# Altium PCB PCB_Jednoruki_bandit.PcbDoc
Units mil, origin at the board's own origin, x right, y up, seen from the top; angles counter-clockwise.
Board outline 4291.34 x 2440.94 mil, 2 copper layers (Top Layer, Bottom Layer); 55 components, 43 nets, 194 pads, 15 vias.
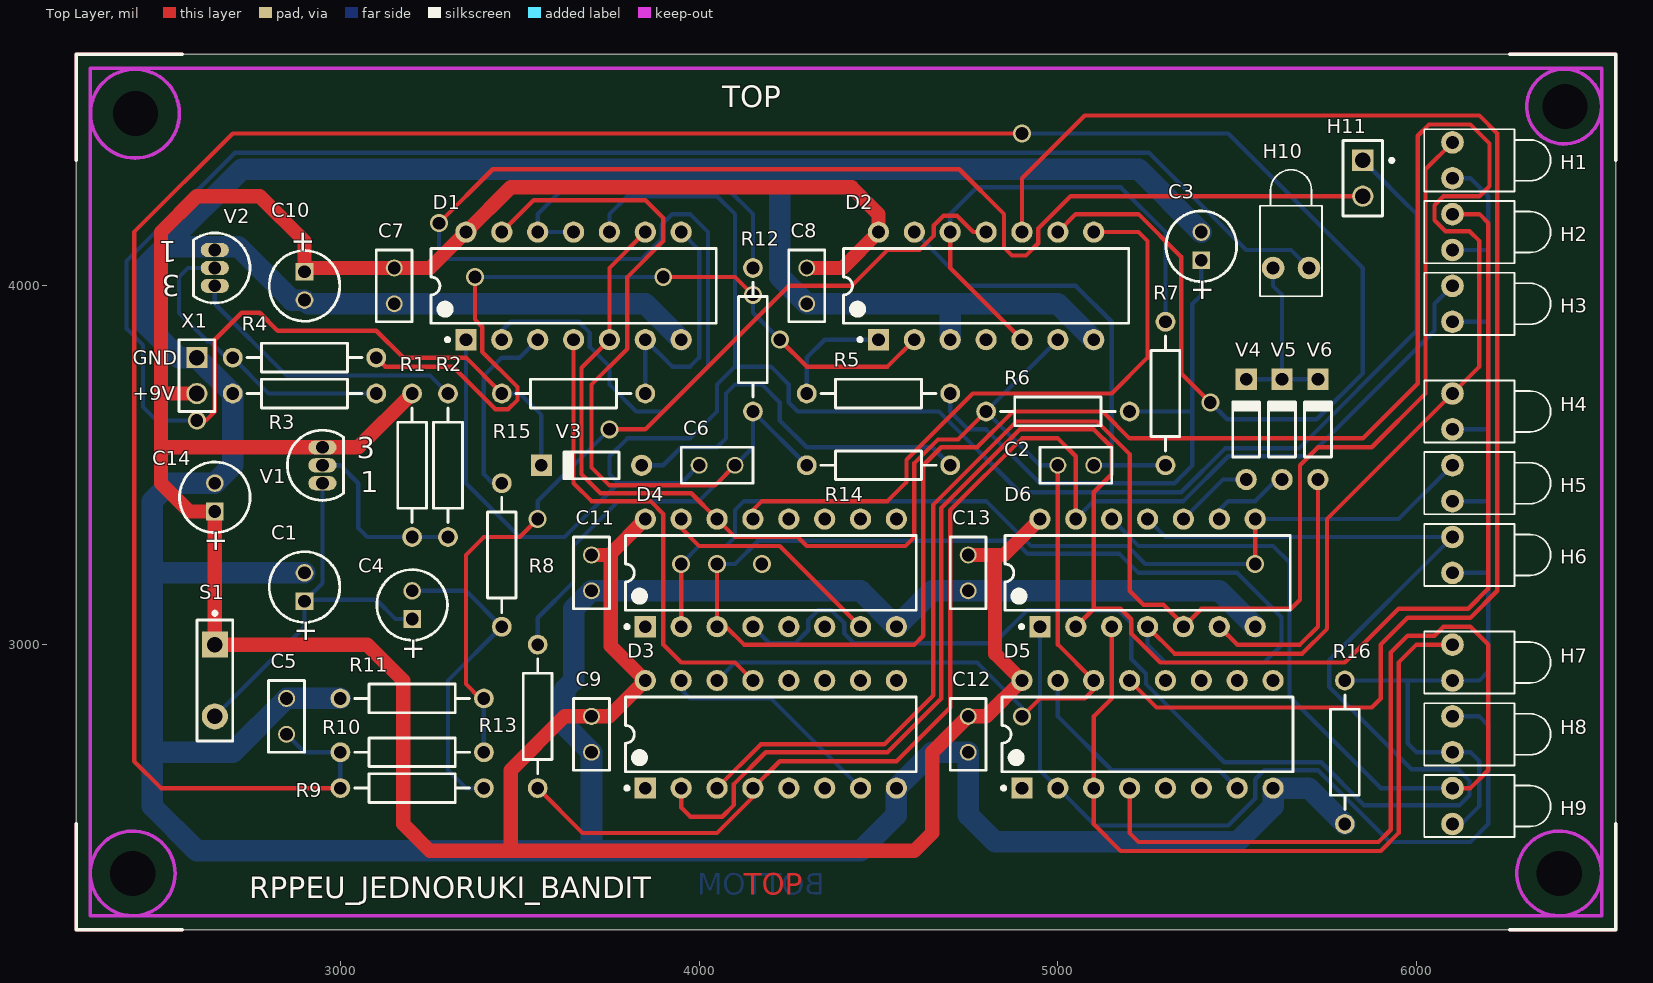
[diagram p0: Top Layer view]
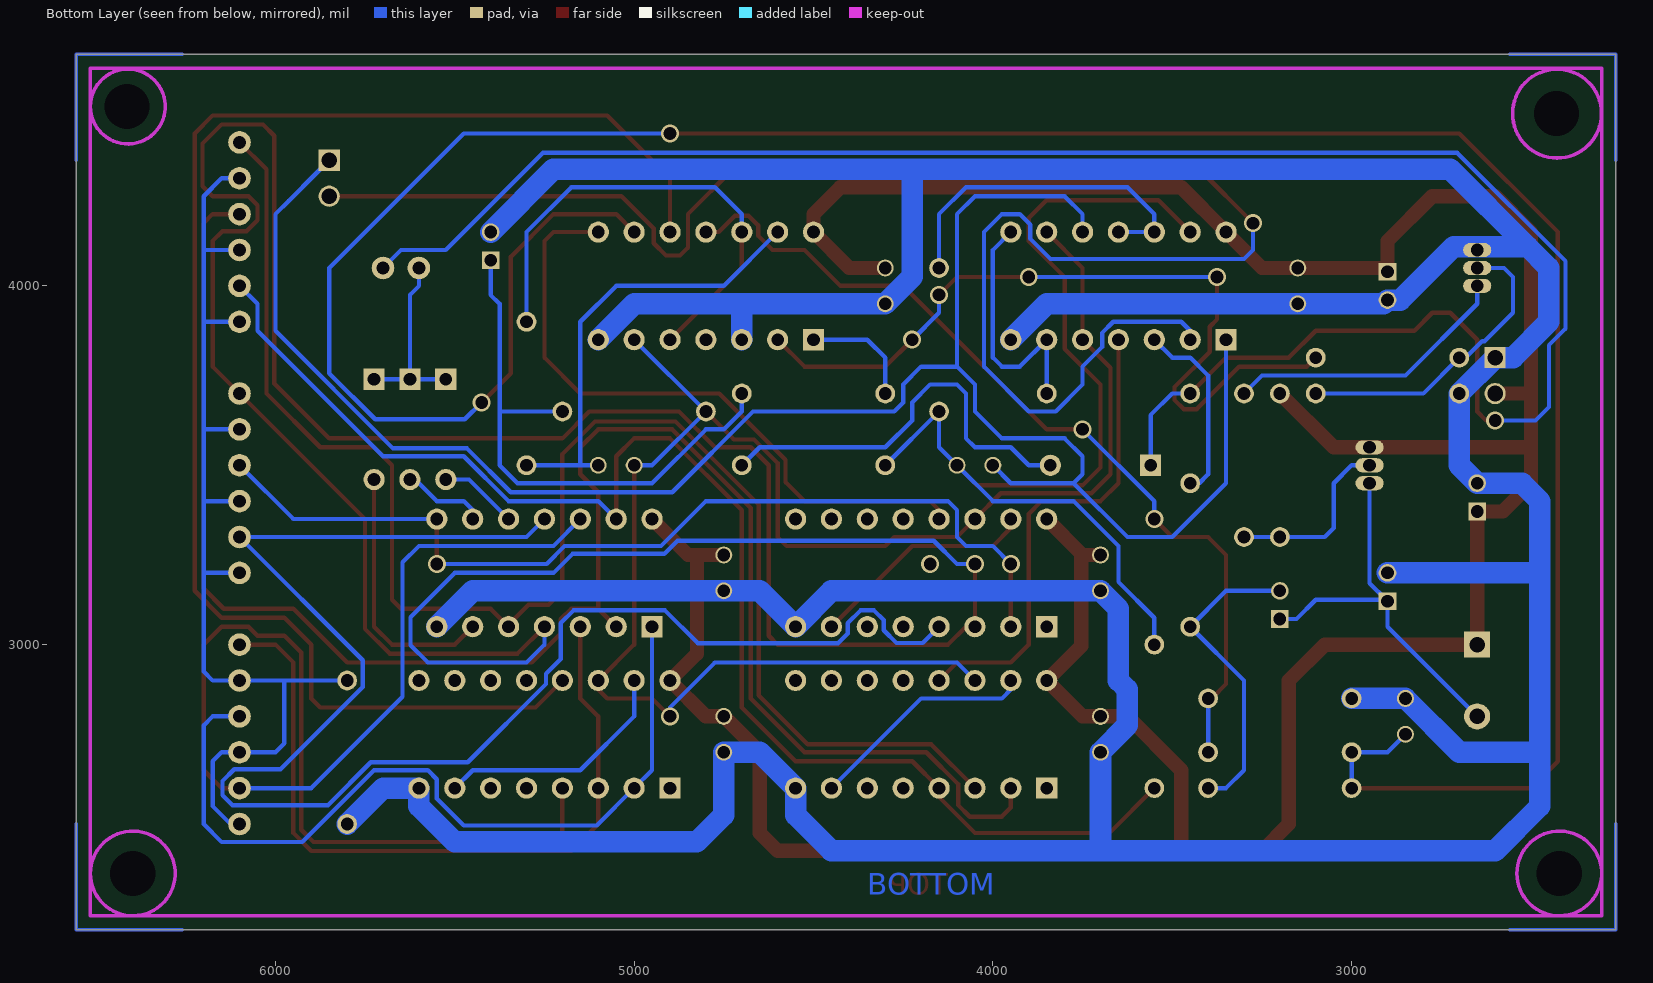
[diagram p1: Bottom Layer view, seen from below]

## Layer stack, top to bottom
Top Layer: signal copper 1.4
Dielectric: dielectric 12.6, FR-4, Dk 4.8
Bottom Layer: signal copper 1.4

## Board outline
2263.78,2204.72 2263.78,4645.67 6555.12,4645.67 6555.12,2204.72

## Design rules (kind name [scope] priority, off if disabled: settings)
Clearance [All] p1: gap=10
HoleSize [All] p1: absolutevalues=TRUE maxlimit=125.98 minlimit=1 maxpercent=80.000 minpercent=20.000
MinimumSolderMaskSliver [All] p1: minsoldermaskwidth=2
PolygonConnect [All] p1: connectstyle=Relief reliefconductorwidth=10 reliefentries=4 polygonreliefangle="90 Angle"
RoutingVias [All] p1: holewidth=28 width=50 viastyle="Through Hole" minholewidth=28 minwidth=50 maxholewidth=28 maxwidth=50
SilkscreenOverComponentPads [All] p1: minsilkscreentomaskgap=2
SolderMaskExpansion [All] p1: expansion=4
Width [All] p1: maxlimit=60 minlimit=10 preferedwidth=12
25 further rules are at their usual default settings.

## Components (designator, comment, footprint, x,y, rotation, side; value= is the part's Value field where it differs from the comment)
C1 "4u7/16V" CAPPR2-5x6.8 2900,3160.63 r90 top
C2 "10n" RAD-0.1 5050,3500 r180 top
C3 "4u7/16V" CAPPR2-5x6.8 5400,4110.63 r90 top
C4 "1u/16V" CAPPR2-5x6.8 3200,3110.63 r90 top
C5 "10n" RAD-0.1 2850,2800 r270 top
C6 "10n" RAD-0.1 4050,3500 r180 top
C7 "100n" RAD-0.1 3150,4000 r90 top
C8 "100n" RAD-0.1 4300,4000 r90 top
C9 "100n" RAD-0.1 3700,2750 r90 top
C10 "10u/16V" CAPPR2-5x6.8 2900,4000 r270 top
C11 "100n" RAD-0.1 3700,3200 r90 top
C12 "100n" RAD-0.1 4750,2750 r90 top
C13 "100n" RAD-0.1 4750,3200 r90 top
C14 "100u/16V" CAPPR2-5x6.8 2650,3410.63 r90 top
D1 "40106" DIP-14 3650,4000 r90 top
D2 "40106" DIP-14 4800,4000 r90 top
D3 "4017" DIP-16 4200,2750 r90 top
D4 "4017" DIP-16 4200,3200 r90 top
D5 "4017" DIP-16 5250,2750 r90 top
D6 "4073" DIP-14 5250,3200 r90 top
H1 "LED1" LED-1 6100,4350 r0 top
H2 "LED1" LED-1 6100,4150 r0 top
H3 "LED1" LED-1 6100,3950 r0 top
H4 "LED1" LED-1 6100,3650 r0 top
H5 "LED1" LED-1 6100,3450 r0 top
H6 "LED1" LED-1 6100,3250 r0 top
H7 "LED1" LED-1 6100,2950 r0 top
H8 "LED1" LED-1 6100,2750 r0 top
H9 "LED1" LED-1 6100,2550 r0 top
H10 "LED1" LED-1 5650,4050 r90 top
H11 "PB2720" PIN2 5850,4350 r270 top
R1 "10k" AXIAL-0.4 3200,3500 r90 top
R2 "4k7" AXIAL-0.4 3300,3500 r270 top
R3 "10k" AXIAL-0.4 2900,3700 r0 top
R4 "10k" AXIAL-0.4 2900,3800 r0 top
R5 "10k" AXIAL-0.4 4500,3700 r0 top
R6 "220k" AXIAL-0.4 5000,3650 r180 top
R7 "1M5" AXIAL-0.4 5300,3700 r90 top
R8 "10k" AXIAL-0.4 3450,3250 r90 top
R9 "470k" AXIAL-0.4 3200,2600 r0 top
R10 "10k" AXIAL-0.4 3200,2700 r180 top
R11 "3M3" AXIAL-0.4 3200,2850 r0 top
R12 "33k" AXIAL-0.4 4150,3850 r270 top
R13 "100k" AXIAL-0.4 3550,2800 r90 top
R14 "33k" AXIAL-0.4 4500,3500 r0 top
R15 "1k" AXIAL-0.4 3650,3700 r180 top
R16 "330" AXIAL-0.4 5800,2700 r270 top
S1 "SW-PB" SPST-2 2650,2900 r270 top
V1 "PNP" TO-92A 2950,3500 r0 top
V2 "NPN" TO-92A 2650,4050 r180 top
V3 "Diode" DO-35 3700,3500 r180 top
V4 "1N4148" DIO7.1-3.9x1.9 5525,3600 r90 top
V5 "1N4148" DIO7.1-3.9x1.9 5625,3600 r90 top
V6 "1N4148" DIO7.1-3.9x1.9 5725,3600 r90 top
X1 "Baterija" HDR1X2 2600,3800 r270 top

## Footprints (in the part's own frame and the unit in brackets; to place one, negate y for a bottom-side part, rotate by r counter-clockwise, add the part's x,y. Pads: shape width x height; smd on the part's side, far side on the other; paste and mask are expansions set on the pad)
AXIAL-0.4 [mm] "Axial Device, Thru-Hole; 2 Leads; 0.4 in Pin Spacing"
  round 1.4 hole 0.9: 1(-5.08,0) 2(5.08,0)
  silkscreen extent -4.06,-1.02 4.06,1.02
CAPPR2-5x6.8 [mm] "Capacitor, Electrolytic, Radial; Body 5 x 6.8 mm (Dia.xH typ); Pin Spacing 2 mm (typ)"
  rect 1.25x1.25 hole 0.9: 1(-1,0)
  round 1.25 hole 0.9: 2(1,0)
  silkscreen extent -2.5,-2.5 2.5,2.5
DIO7.1-3.9x1.9 [mm] "Diode, Axial; Body 3.8 x 1.9 mm (LxDia. max), Lead Dia. 0.53 mm (max)"
  round 1.5 hole 0.9: 1(-3.55,0)
  rect 1.5x1.5 hole 0.9: 2(3.55,0)
  silkscreen extent -1.95,-0.95 2.05,0.95
DIP-14 [mm] "DIP; 14 Leads; Row Spacing 7.62 mm; Pitch 2.54 mm"
  rect 1.5x1.5 hole 0.9: 1(-3.81,7.62)
  round 1.5 hole 0.9: 2(-3.81,5.08) 3(-3.81,2.54) 4(-3.81,0) 5(-3.81,-2.54) 6(-3.81,-5.08) 7(-3.81,-7.62) 8(3.81,-7.62) 9(3.81,-5.08) 10(3.81,-2.54) 11(3.81,0) 12(3.81,2.54) 13(3.81,5.08) 14(3.81,7.62)
  silkscreen extent -3.93,-10.1 2.65,10.1, body extent -3.6,-10.1 3.6,10.1, height 5.08
DIP-16 [mm] "DIP; 16 Leads; Row Spacing 7.62 mm; Pitch 2.54 mm"
  rect 1.5x1.5 hole 0.9: 1(-3.81,8.89)
  round 1.5 hole 0.9: 2(-3.81,6.35) 3(-3.81,3.81) 4(-3.81,1.27) 5(-3.81,-1.27) 6(-3.81,-3.81) 7(-3.81,-6.35) 8(-3.81,-8.89) 9(3.81,-8.89) 10(3.81,-6.35) 11(3.81,-3.81) 12(3.81,-1.27) 13(3.81,1.27) 14(3.81,3.81) 15(3.81,6.35) 16(3.81,8.89)
  silkscreen extent -3.93,-10.3 2.65,10.31, body extent -3.6,-10.28 3.6,10.28, height 5.08
DO-35 [mm] "Diode, Axial; Body 3.8 x 1.9 mm (LxDia. max), Lead Dia. 0.53 mm (max)"
  round 1.5 hole 0.9: 1(-3.55,0)
  rect 1.5x1.5 hole 0.9: 2(3.55,0)
  silkscreen extent -1.95,-0.95 2.05,0.95
HDR1X2 [mm] "Connector; Header; 2 Position"
  rect 1.5x1.5 hole 1.1: 1(0,0)
  round 1.5 hole 1.1: 2(2.54,0)
  silkscreen extent -1.27,-1.27 3.81,1.27
LED-1 [mm] "Typical RED GaAs LED; 2 Leads"
  round 1.6 hole 0.9: 1(0,1.27) 2(0,-1.27)
  silkscreen extent -2,-2.2 6.95,2.2
PIN2 [mm] "Photosensitive Diode; 2 Leads"
  rect 1.5x1.5 hole 1.1: 1(0,0)
  round 1.5 hole 1.1: 2(2.54,0)
  silkscreen extent -1.4,-1.4 3.94,2.18
RAD-0.1 [mm] "Radial Cap, Thru-Hole; 2 Leads; 0.1 in Pin Spacing"
  round 1.2 hole 0.9: 1(-1.27,0) 2(1.27,0)
  silkscreen extent -2.54,-1.27 2.54,1.27
SPST-2 [mm] "Circuit Breaker; 2 Leads"
  rect 1.85x1.85 hole 1.1: 1(-2.54,0)
  round 1.85 hole 1.1: 2(2.54,0)
  silkscreen extent -4.89,-1.27 4.28,1.27
TO-92A [mm] "TO, Flat Index; 3 In-Line, Axial Leads; Body Dia. 4.5mm; Leads 0.51 x 0.48 mm (max)"
  oval 2x1 hole 0.9: 1(0,-1.27) 2(0,0) 3(0,1.27)
  silkscreen extent -2.48,-2.48 1.5,2.48

## Part data
C1 C3 C4 C10 C14: library part Elektrolitski_kondenzator
C2 C5 C6 C7 C8 C9 C11 C12 C13: library part Cap, "Capacitor"
H1 H2 H3 H4 H5 H6 H7 H8 H9 H10: "Typical RED GaAs LED"
H11: library part Speaker, "Loudspeaker"
R1 R2 R3 R4 R5 R6 R7 R8 R9 R10 R11 R12 R13 R14 R15 R16: library part Res2, "Resistor"
S1: "Switch"
V1: "PNP Bipolar Transistor"
V2: "NPN Bipolar Transistor"
V3: "Default Diode"
V4 V5 V6: library part "Diode 1N4148", "High Conductance Fast Diode"
X1: library part "Header 2", "Header, 2-Pin"

## Free pads (board coordinates)
  round 118.11 hole 125.98: 0(2421.26,2362.2) 0(2429.13,4480.31) 0(6397.64,2362.2) 0(6413.39,4500)

## Via types
v1: diameter 50, hole 35.43, Top Layer to Bottom Layer, 15 vias

## Nets (pads, with @x,y where several pads share a name; then routed paths per layer and width w, separated by ;. In a path a pad name is that pad's centre, name@x,y a point inside that pad or via, vN(x,y) a via of type N, cw(c..) or ccw(c..) an arc to the next point about the centre after c; other vN are vias at no path point)
GND: C1.2 C3.2 C5.1 C7.1 C8.1 C9.1 C10.2 C11.1 C12.1 C13.1 C14.2 D1.7 D2.3 D2.7 D3.8 D4.8 D5.8 D6.7 R3.1 R11.1 R16.2 V2.1 X1.1 | length 15478.4
  Bottom Layer w60: C1.2 2475,3200 ; R11.1 C5.1 2700,2700 2475,2700 ; D1.7 3850,3950 3225,3950 C7.1 2910.63,3950 C10.2 2864.37,3960.63 2715.32,4109.69 2509.68,4109.69 ; D2.3 4700,3950 ; D2.7 5000,3950 4700,3950 ; C3.2 5225,4325 4225,4325 ; D6.7 5450,3150 C13.1 4650,3150 D4.8 4450,3150 C11.1 3650,3100 3650,2900 3625,2875 3625,2775 C9.1 3700,2425.79 3700.79,2425 ; R16.2 5700,2600 D5.8 5600,2550 5500,2450 5019.68,2450 4825,2450 4750,2525 C12.1 4650,2700 D3.8 4550,2525 4450,2425 3700.79,2425 ; 2475,2700 2475,2550 2600,2425 3700.79,2425 ; 2475,2700 2475,3200 ; 2475,3200 2475,3400 2525,3450 C14.2 2700,3500 R3.1 X1.1 2550,3800 2450,3900 2450,4050 2509.68,4109.69 ; 2509.68,4109.69 2725,4325 4225,4325 ; 4225,4325 4225,4025 C8.1 4700,3950
NetC1_1: C1.1 C4.1 S1.2 V1.1 | length 1092.8
  Bottom Layer w12: S1.2 2900,3050 C1.1 C1.1@2903.74,3125 ; V1.1 2950,3171.26 C1.1@2903.74,3125 ; C4.1 3153.74,3071.26 3100,3125 C1.1@2903.74,3125
NetC2_1: C2.1 D2.13 R7.1 | length 1253.6
  Bottom Layer w12: D2.13 4750,4000 5050,4000 5150,3900 5150,3500 ; C2.1 5150,3500 ; R7.1 5150,3500
NetC2_2: C2.2 D1.5 D1.9 D2.6 D3.14 D4.14 D5.14 R6.2 | length 4625.6
  Top Layer w12: D1.9 3750,4050 D1.5 3672,3772 3672,3475 3725,3422 3978,3422 D4.14 4100,3300 4275,3300 4300,3275 4575,3275 4600,3300 4600,3506.11 4665.89,3572 4722,3572 R6.2 ; v1(4900,2800) 4950,2850 5075,2850 5100,2875 D5.14 5000,3000 C2.2
  Bottom Layer w12: D3.14 4100,2950 4775,2950 4900,2825 v1(4900,2800) ; C2.2 4950,3500 R6.2 D2.6
NetC3_1: C3.1 R5.2 R6.1 | length 1685.2
  Bottom Layer w12: R5.2 4700,3650 4750,3600 4800,3600 4950,3450 5325,3450 5375,3500 5375,3650 R6.1 ; 5375,3550 5375,3950 5400,3975 C3.1
NetC4_2: C4.2 R8.1 R9.2 | length 874.3
  Bottom Layer w12: C4.2 3350,3150 R8.1 3300,2900 3300,2650 3350,2600 R9.2
NetC5_2: C5.2 D2.9 R9.1 R10.2 | length 7690.9
  Top Layer w12: R9.1 2500,2600 2425,2675 2425,4150 2700,4425 v1(4900,4425) ; D2.9 5050,4200 5225,4200 5343.56,4081.44 5343.56,3756.44 v1(5425,3675)
  Bottom Layer w12: C5.2 2900,2700 R10.2 R9.1 ; v1(4900,4425) 5475,4425 5850,4050 5850,3756.11 5721.94,3628.06 5471.94,3628.06 v1(5425,3675)
NetC6_1: C6.1 D1.13 R12.2 R13.2 R14.1 | length 2971.8
  Top Layer w12: D1.13 3539,4239 3850,4239 3900,4189 3900,4125 3800,4025 3800,3825 3700,3725 3700,3494 3750,3444 4044,3444 C6.1
  Bottom Layer w12: R13.2 3550,3075 3650,3175 3650,3275 3775,3400 4000,3400 C6.1 4150,3550 R12.2 R14.1
NetC6_2: C6.2 D1.1 D1.10 H11.1 | length 5442
  Bottom Layer w12: D1.1 3350,3450 3500,3300 3625,3300 3775,3450 ; D1.10 3750,4200 3800,4250 4050,4250 4100,4200 4100,3775 ; C6.2 3950,3450 3775,3450 ; H11.1 5887.5,4312.5 5962.5,4237.5 6000,4200 6000,3875 5672,3547 5465.89,3547 5343.89,3425 4893.89,3425 4668.89,3650 4275,3650 4250,3675 4250,3725 4200,3775 4100,3775 ; 3775,3450 3750,3475 3750,3525 3800,3575 3975,3575 4050,3650 4050,3725 4100,3775
NetD1_2: D1.2 H11.2 | length 5007.9
  Top Layer w12: v1(3275,4175) 3425,4325 4725,4325 4850,4200 4850,4106.69 4872.05,4084.65 4911.42,4084.65 4945.53,4118.76 4945.53,4159.91 5035.61,4250 H11.2
  Bottom Layer w12: v1(3275,4175) 3275,4100 3300,4075 3839.39,4075 3895.53,4131.14 3895.53,4170.53 3925,4200 3975,4200 4025,4150 4025,3775 3900,3650 3825,3650 3750,3725 3750,3775 3695.53,3829.47 3695.53,3868.86 3664.39,3900 3475,3900 3450,3875 D1.2
NetD1_3: D1.3 R8.2 | length 526.8
  Bottom Layer w12: R8.2 3425,3450 3400,3475 3400,3750 3450,3800 3500,3800 D1.3
NetD1_4: D1.4 D3.13 | length 1341.3
  Top Layer w12: D1.4 3650,3450 3700,3400 3864.39,3400 3900,3364.39 3900,3000 3950,2950 4100,2950 D3.13
NetD1_6: D1.6 D1.8 R15.1 | length 712.1
  Bottom Layer w12: R15.1 D1.6 3925,3775 3975,3775 4000,3800 4000,4100 D1.8
NetD1_11: D1.11 D1.12 R12.1 | length 962.1
  Bottom Layer w12: D1.11 D1.12 3550,4200 3625,4275 4075,4275 4150,4200 R12.1
NetD2_1: D2.1 R5.1 | length 320.7
  Bottom Layer w12: R5.1 4300,3800 4350,3850 D2.1
NetD2_2: D2.2 R4.2 | length 2244.7
  Top Layer w12: R4.2 3125,3775 3225,3775 3313.4,3775 3431.96,3656.44 3468.04,3656.44 3493.56,3681.96 3493.56,3718.04 3395.53,3816.07 3395.53,3886.16 3375,3906.68 v1(3375,4025) ; v1(3900,4025) 4100,4025 v1(4150,3975) ; v1(4225,3850) 4300,3775 4525,3775 D2.2
  Bottom Layer w12: v1(3375,4025) v1(3900,4025) ; v1(4150,3975) 4150,3925 v1(4225,3850)
NetD2_5: D2.5 D2.12 R7.2 | length 1365.7
  Top Layer w12: D2.12 4700,4050 D2.5
  Bottom Layer w12: D2.12 4700,4200 4775,4275 5175,4275 5300,4150 R7.2
NetD2_8: D2.8 D4.13 | length 1822.8
  Top Layer w12: D4.13 4150,3375 4175,3400 4525,3400 4578,3453 4578,3515.23 4762.77,3700 5150,3700 5250,3800 5250,4125 5225,4150 D2.8
NetD2_10: D2.10 D5.13 | length 4096.8
  Top Layer w12: D2.10@4900,4175 4900,4300 5075,4475 6175,4475 6225,4425 6225,3175 6225,3150 6150,3075 5975,3075 5900,3000 5900,2850 5875,2825 5275,2825 D5.13
NetD2_11: D2.11 R10.1 R11.2 | length 2483.1
  Top Layer w12: R11.2 3390.16,2850 3350,2890.16 3350,3250 3400,3300 3500,3300 v1(3550,3350) ; v1(3750,3600) 3850,3600 4250,4000 4425,4000 4525,4100 4614.39,4100 4654.47,4140.09 4654.47,4168.86 4681.14,4195.53 4718.86,4195.53 4764.39,4150 D2.11
  Bottom Layer w12: R10.1 R11.2 ; v1(3550,3350) 3550,3400 v1(3750,3600)
NetD3_2: D3.2 D6.2 H2.1 | length 5044
  Top Layer w12: D3.2@3950,2575 D3.2 3950,2546.06 3975.68,2520.38 3977.07,2520.38 4064.27,2520.38 4096.94,2553.06 4096.94,2611.33 4185.61,2700 4525,2700 4675,2850 4675,3381.11 4893.89,3600 5100,3600 5150,3550 5150,3475 5100,3425 5100,3100 ; D6.2 5100,3100 ; H2.1 6175,4200 6200,4175 6200,3156.11 6143.89,3100 5950,3100 5800,2950 5285.61,2950 5204.47,3031.14 5204.47,3070.53 5175,3100 5100,3100
NetD3_3: D3.3 D6.5 H1.1 | length 4404.5
  Top Layer w12: D3.3 4172,2722 4515.89,2722 4653,2859.11 4653,3390.23 4884.77,3622 5109.11,3622 5200,3531.11 5200,3150 5238.98,3111.02 5294.49,3111.02 D6.5@5344.49,3061.02 ; D6.5@5350,3075 D6.5 5400,3100 5650,3100 5675,3125 5675,3500 5725,3550 5875,3550 6025,3700 6025,4325 H1.1
NetD3_4: D3.4 D6.13 H3.1 R13.1 | length 3903.1
  Top Layer w12: R13.1 3675,2475 4050,2475 4150,2575 D3.4 4225,2675 4550,2675 4700,2825 4700,3375 4900,3575 5000,3575 5050,3525 D6.13
  Bottom Layer w12: D6.13 5100,3400 5350,3400 5475,3525 5700,3525 6050,3875 6050,3950 H3.1
NetD3_7: D3.7 D3.15 | length 638.9
  Bottom Layer w12: D3.15 3950,2875 3975,2850 4200,2850 D3.7
NetD4_2: D4.2 D6.8 H5.1 | length 2701
  Top Layer w12: D4.2 v1(3950,3225) ; v1(5550,3225) D6.8
  Bottom Layer w12: v1(3950,3225) 4000,3275 4075,3275 4100,3300 4100,3375 4125,3400 4800,3400 4925,3275 5193.89,3275 5243.89,3225 v1(5550,3225) ; D6.8 5950,3350 H5.1
NetD4_3: D4.3 D6.4 H4.1 | length 8248.8
  Top Layer w12: v1(4050,3225) D4.3 4075,3050 4125,3000 4600,3000 4625,3025 4625,3500 4675,3550 4775,3550 4875,3650 5125,3650 5200,3575 5850,3575 6003,3728 6003,4418.35 6034.65,4450 6150,4450 6203,4397 6203,4278 6175,4250 6075,4250 6050,4225 6050,4182.83 6080.33,4152.5 6147.5,4152.5 6175,4125 6175,3775 H4.1 5750,3350 5750,3043.89 5681.11,2975 5325,2975 D6.4
  Bottom Layer w12: v1(4050,3225) 4100,3225 4164.62,3289.62 4879.27,3289.62 4915.89,3253 5172,3253 5225,3200 5500,3200 5623.53,3076.47 5623.53,2998.53 5575,2950 5300,2950 5250,3000 D6.4
NetD4_4: D4.4 D6.11 H6.1 | length 4445.6
  Bottom Layer w12: D4.4 4195.53,3004.47 4268.86,3004.47 4304.47,3040.09 4304.47,3068.86 4331.14,3095.53 4368.86,3095.53 4404.47,3059.91 4404.47,3031.14 4431.61,3004 4822.32,3004 4913.85,3095.53 5168.86,3095.53 5204.47,3059.91 5204.47,2959.91 5245.53,2918.86 5245.53,2890.09 5463.61,2672 5734.11,2672 5853.61,2552.5 6119.67,2552.5 6147.5,2580.33 6147.5,2619.67 6114.67,2652.5 5985.89,2652.5 5756.44,2881.96 5756.44,2956.44 H6.1 5300,3300 D6.11
NetD4_7: D4.7 D4.15 | length 638.9
  Top Layer w12: D4.15 3950,3325 4000,3275 4225,3275 D4.7
NetD5_2: D5.2 D6.1 H8.1 | length 2298.1
  Bottom Layer w12: D6.1 4950,2650 D5.2 5104,2496 5475,2496 5550,2571 5550,2625 5575,2650 5725,2650 5925,2450 6150,2450 6200,2500 6200,2775 6175,2800 H8.1
NetD5_3: D5.3 D6.3 H7.1 | length 2118.2
  Top Layer w12: D6.3 5150,2850 5100,2800 D5.3 5100,2500 5175,2425 5900,2425 5950,2475 5950,2950 6000,3000 H7.1
NetD5_4: D5.4 D6.12 H9.1 | length 3644.9
  Top Layer w12: D5.4 5200,2475 5225,2450 5893.89,2450 5928,2484.11 5928,2978 5975,3025 6050,3025 6075,3050 6150,3050 6200,3000 6200,2650 6150,2600 H9.1
  Bottom Layer w12: D6.12 5225,3275 5600,3275 5645.53,3229.47 5645.53,2854.47 5900,2600 H9.1
NetD5_7: D5.7 D5.15 | length 682.8
  Bottom Layer w12: D5.15 5000,2800 5150,2650 5450,2650 D5.7
NetD6_6: D6.6 V6.1 | length 726.7
  Top Layer w12: D6.6 5500,3000 5675,3000 5725,3050 V6.1
NetD6_9: D6.9 V5.1 | length 235.3
  Bottom Layer w12: D6.9 5450,3375 5475,3400 5550,3400 5610.24,3460.24 V5.1
NetD6_10: D6.10 V4.1 | length 220.7
  Bottom Layer w12: D6.10 5460.24,3460.24 V4.1
NetH1_2: H1.2 H2.2 H3.2 H4.2 H5.2 H6.2 H7.2 H8.2 H9.2 R16.1 | length 2972.5
  Bottom Layer w12: R16.1 5975,2900 ; H9.2 6125,2500 6175,2550 6175,2675 6150,2700 H8.2 6000,2700 5975,2725 5975,2900 ; H6.2 6200,3200 ; H5.2 6200,3400 ; H4.2 6200,3600 ; H3.2 6200,3900 ; H2.2 6200,4100 ; H1.2 6150,4300 6200,4250 6200,4100 ; 5975,2900 H7.2 6175,2900 6200,2925 6200,3200 ; 6200,3200 6200,3400 ; 6200,3400 6200,3600 ; 6200,3600 6200,3900 ; 6200,3900 6200,4100
NetH10_1: H10.1 V4.2 V5.2 V6.2 | length 520.6
  Bottom Layer w12: V4.2 V5.2 ; H10.1 5600,4000 5625,3975 V5.2 ; V6.2 V5.2
NetH10_2: H10.2 R15.2 V3.2 | length 5604.9
  Top Layer w12: v1(2600,3625) 2625,3625 2650,3650 2650,3850 2725,3925 2775,3925 2825,3875 3100,3875 3175,3800 3350,3800 R15.2
  Bottom Layer w12: v1(2600,3625) 2487.2,3625 2450,3662.2 2450,3834.95 2404,3880.95 2404,4069.05 2705.95,4371 5254,4371 5525,4100 5650,4100 H10.2 ; R15.2 3500,3700 3560.24,3639.76 V3.2
NetR1_1: R1.1 R2.2 V1.2 | length 506.1
  Bottom Layer w12: V1.2 3000,3500 3050,3450 3050,3325 3075,3300 R1.1 R2.2
NetR2_1: R2.1 V2.3 | length 803.6
  Bottom Layer w12: V2.3 2650,3950 2850,3750 3250,3750 R2.1
NetR3_2: R3.2 R4.1 V2.2 | length 853.6
  Bottom Layer w12: V2.2 2575,4050 2550,4025 2550,3925 2629.47,3845.53 2636.16,3845.53 2681.68,3800 R4.1 2800,3700 R3.2
NetR14_2: R14.2 V3.1 | length 1149.1
  Bottom Layer w12: V3.1 3900,3500 3950,3550 4050,3550 4075,3575 4075,3700 4100,3725 4175,3725 4225,3675 4225,3625 4300,3550 4650,3550 R14.2
VCC: C7.2 C8.2 C9.2 C10.1 C11.2 C12.2 C13.2 C14.1 D1.14 D2.14 D3.16 D4.16 D5.16 D6.14 R1.2 S1.1 V1.3 X1.2 | length 9674.8
  Top Layer w40: 2500,3700 X1.2 ; R1.2 3050,3550 V1.3 2500,3550 ; C11.2 3750,3250 ; D4.16 3750,3250 ; C8.2 4400,4050 D2.14 4500,4200 4425,4275 3475,4275 D1.14 3250,4050 C7.2 2910.63,4050 C10.1 2900,4125 2775,4250 2600,4250 2500,4150 2500,3650 2500,3550 ; C13.2 4825,3250 ; D6.14 4850,3250 4825,3250 ; 2500,3550 2500,3450 2578.74,3371.26 C14.1 S1.1 3075,3000 3175,2900 3175,2500 3250,2425 3475,2425 ; 3475,2425 3475,2650 3625,2800 C9.2 3750,2800 D3.16 3753.62,2996.38 3753.62,3246.38 3750,3250 ; 3475,2425 4600,2425 4650,2475 4650,2700 C12.2 4800,2800 D5.16 4825,2975 4825,3250
pads on no net: D2.4 D3.1 D3.5 D3.6 D3.9 D3.10 D3.11 D3.12 D4.1 D4.5 D4.6 D4.9 D4.10 D4.11 D4.12 D5.1 D5.5 D5.6 D5.9 D5.10 D5.11 D5.12
copper on no net: | length 4724.4
  Top Layer w10: 2263.78,2500 2263.78,2204.72 2559.06,2204.72 ; 2263.78,4350.39 2263.78,4645.67 2559.06,4645.67 ; 6259.84,2204.72 6555.12,2204.72 6555.12,2500 ; 6259.84,4645.67 6555.12,4645.67 6555.12,4350.39
  Bottom Layer w10: 2263.78,2500 2263.78,2204.72 2559.06,2204.72 ; 2263.78,4350.39 2263.78,4645.67 2559.06,4645.67 ; 6259.84,2204.72 6555.12,2204.72 6555.12,2500 ; 6259.84,4645.67 6555.12,4645.67 6555.12,4350.39
  other v1: 4175,3225

## Keep-outs
Keep-Out Layer:
  circle w10: c2421.26,2362.2 r118.11
  circle w10: c2427.39,4480.31 r123.79
  circle w10: c6411.34,4500 r104.4
  circle w10: c6397.64,2362.2 r118.11
  lines w10: 2303.15,2244.09 2303.15,4606.3 6515.75,4606.3 6515.75,2244.09 2303.15,2244.09

## Other copper
Top Layer:
  text "TOP" at 4124.02,2303.15 h60
Bottom Layer:
  text "BOTTOM" at 4350.39,2303.15 h60

## Silkscreen, mask and mechanical layers (free items; w line width, h text height)
Top Overlay:
  lines w10: 2263.78,2500 2263.78,2204.72 2559.06,2204.72 ; 2263.78,4350.39 2263.78,4645.67 2559.06,4645.67 ; 6259.84,2204.72 6555.12,2204.72 6555.12,2500 ; 6259.84,4645.67 6555.12,4645.67 6555.12,4350.39
  text "TOP" at 4064.96,4498.03 h60
  text "GND" at 2421.26,3779.53 h40
  text "+9V" at 2421.26,3681.1 h40
  text "RPPEU_JEDNORUKI_BANDIT" at 2746.06,2293.31 h60
Mechanical 1:
  the board outline again, w10
Drill Drawing:
  text ".LEGEND" at 6889.76,3946.85 h60

## Dimensions
6555.12,4645.67 to 6555.12,2204.72 on Mechanical 2
2263.78,2204.72 to 6555.12,2204.72 on Mechanical 2

## Text inside footprints (layer, text, board x,y; h text height)
C1: Top Overlay "+" at 2929.53,3004.13 h59.06 r90
C3: Top Overlay "+" at 5429.53,3954.13 h59.06 r90
C4: Top Overlay "+" at 3229.53,2954.13 h59.06 r90
C10: Top Overlay "+" at 2870.47,4156.5 h59.06 r270
C14: Top Overlay "+" at 2679.53,3254.13 h59.06 r90
V1: Top Overlay "1" at 3054.72,3425.2 h59.05; Top Overlay "3" at 3045.67,3520.08 h59.05
V2: Top Overlay "1" at 2545.28,4124.8 h59.05 r180; Top Overlay "3" at 2554.33,4029.92 h59.05 r180